# Altium PCB PCB.PcbDoc
Units mm, origin at the board's own origin, x right, y up, seen from the top; angles counter-clockwise.
Board outline 95.25 x 75.25 mm, 2 copper layers (Top Layer, Bottom Layer); 50 components, 55 nets, 168 pads, 12 vias.
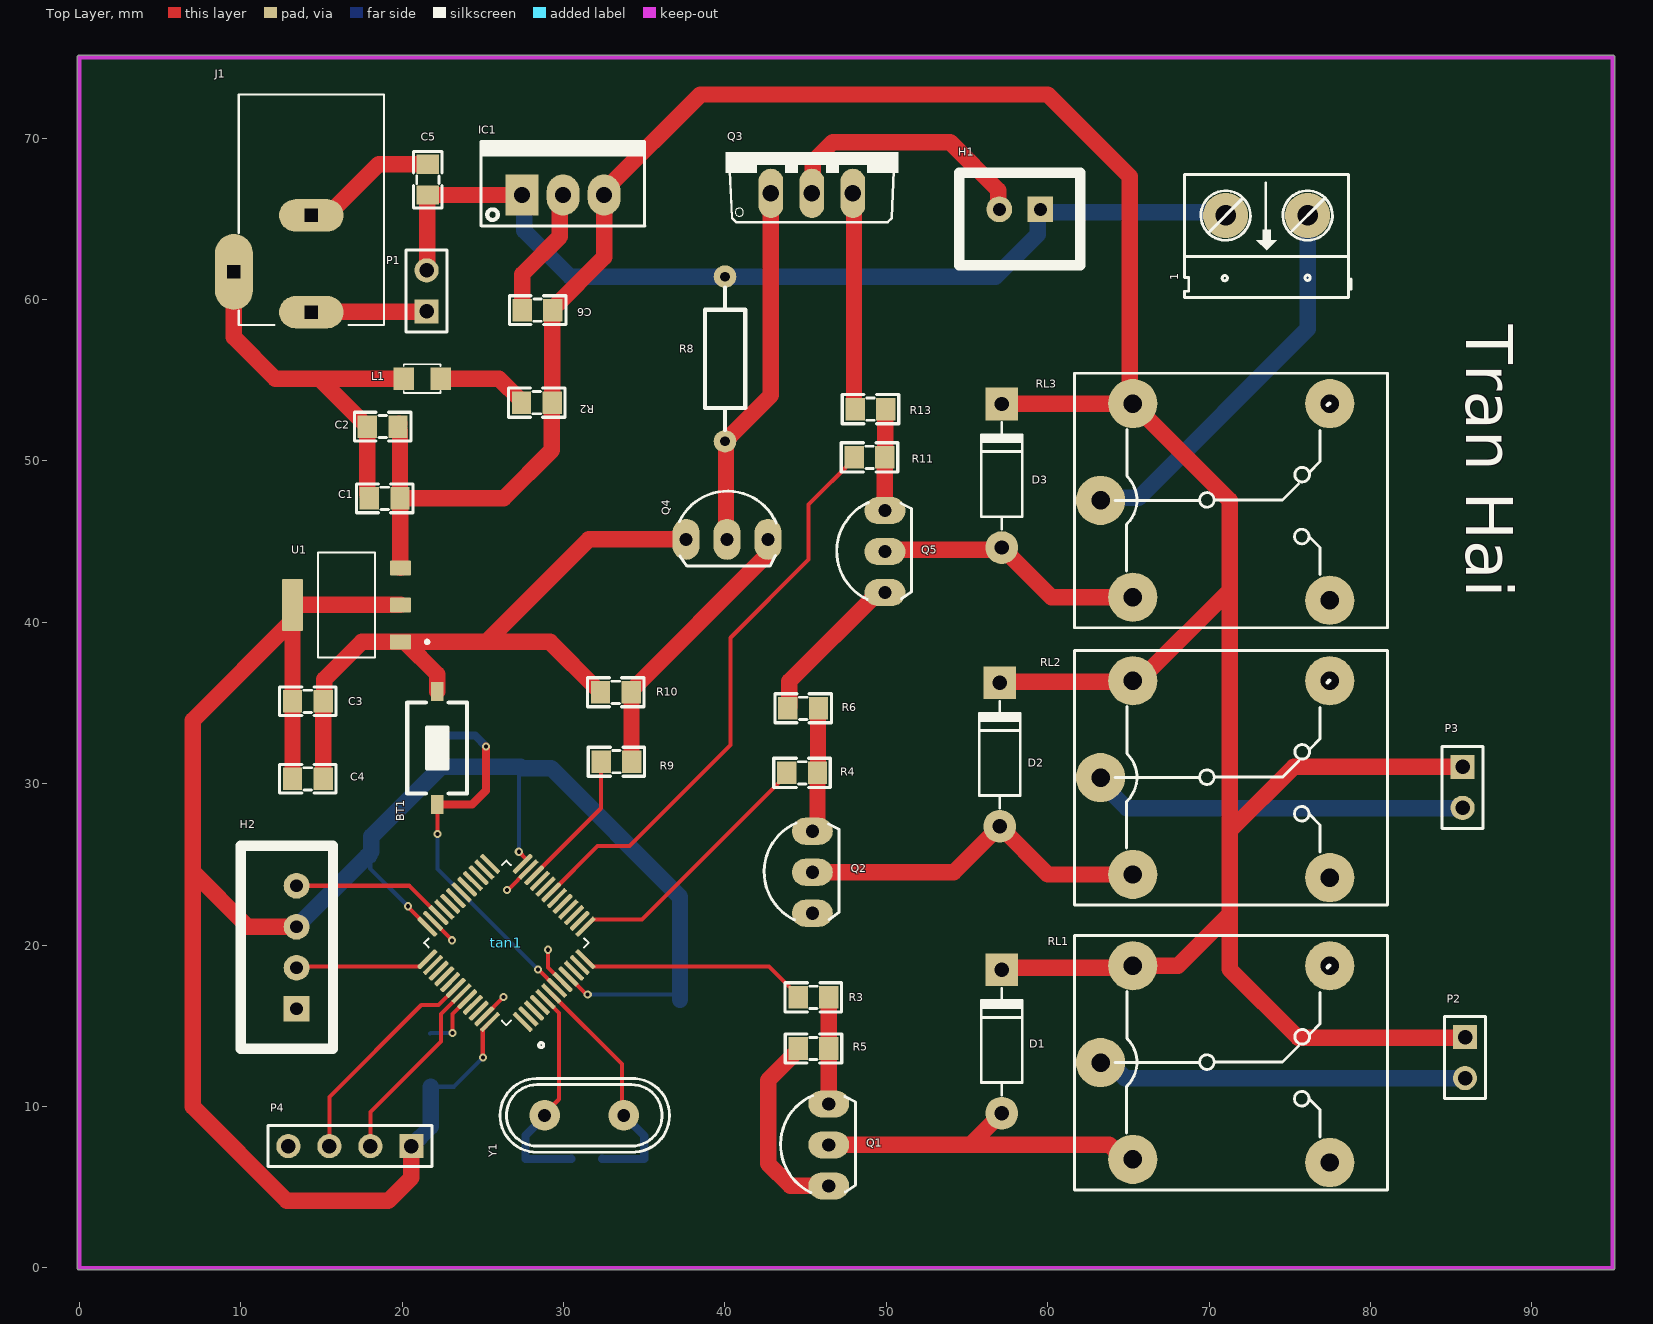
[diagram p0: Top Layer view]
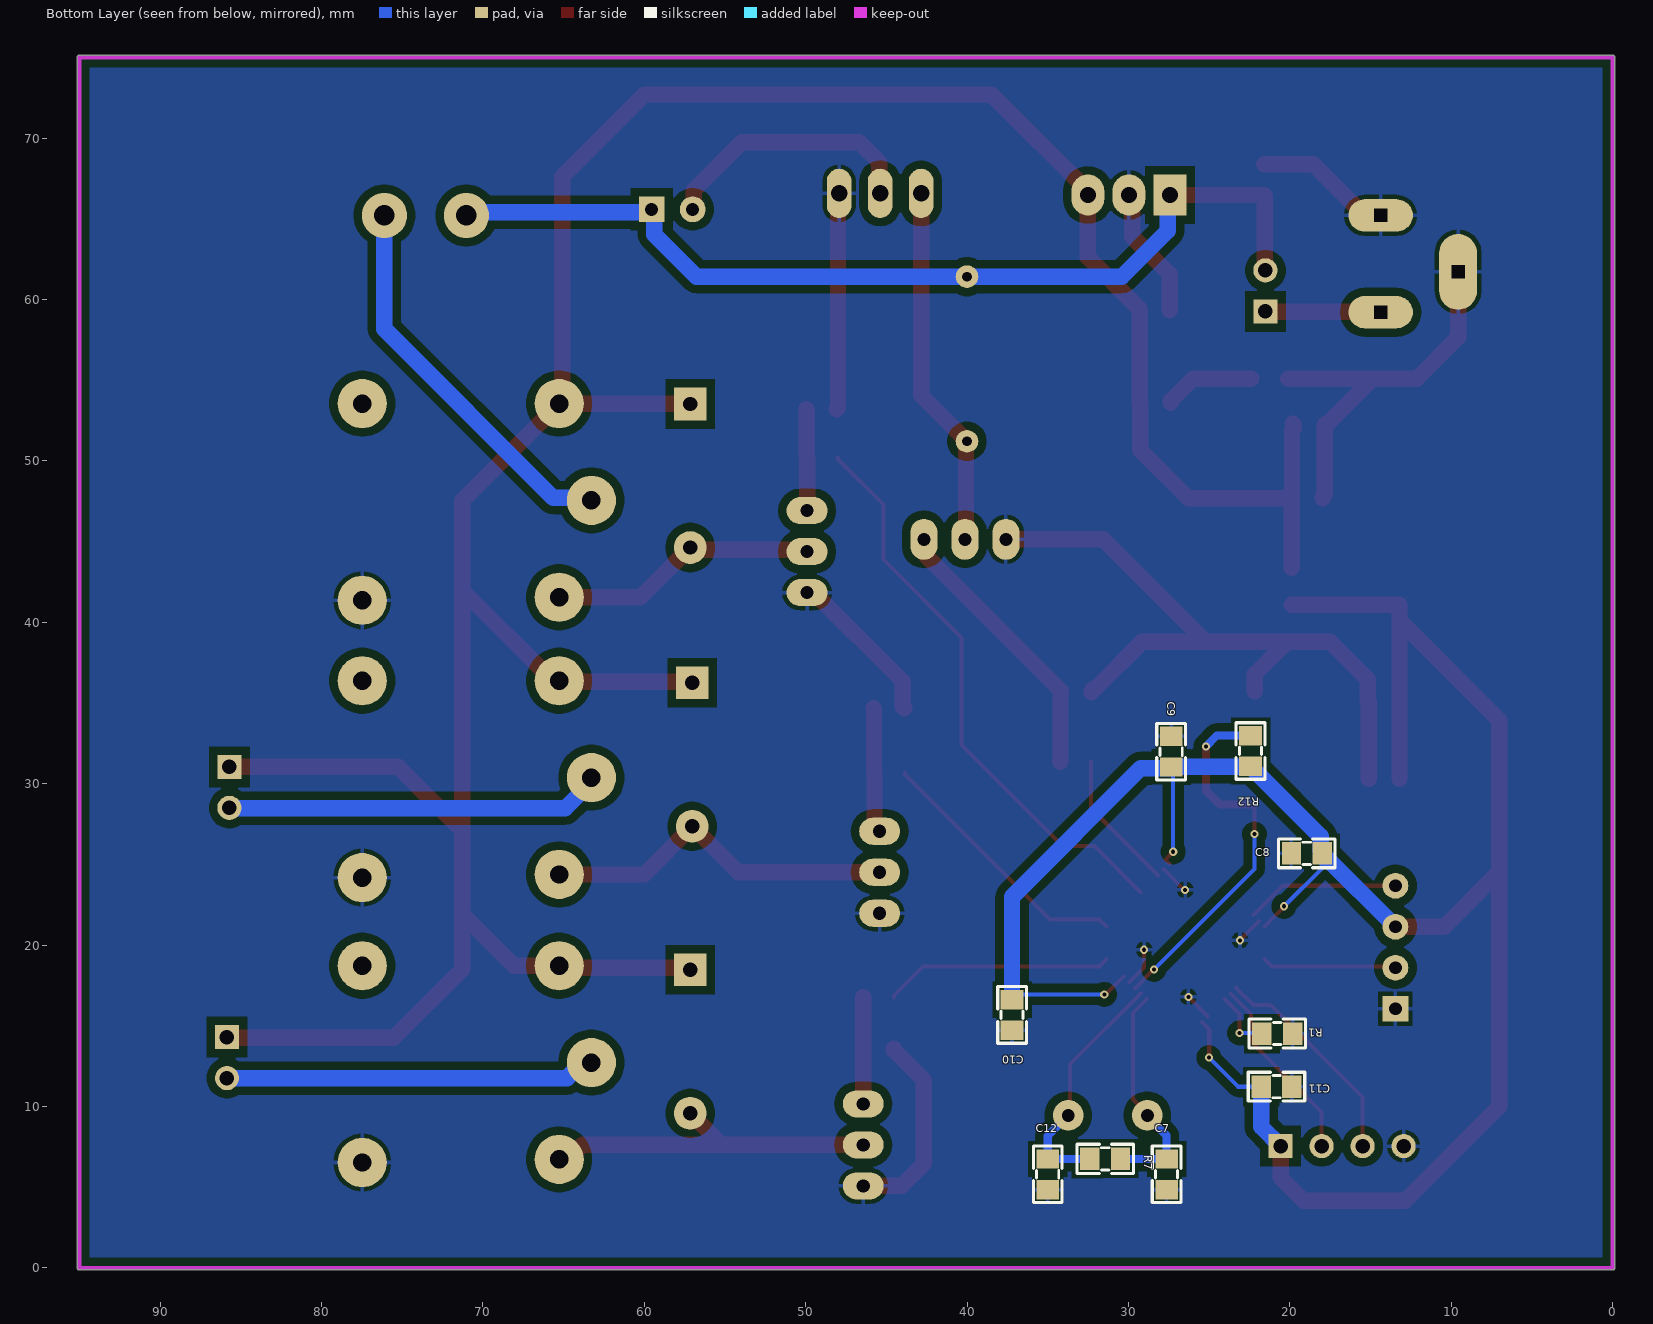
[diagram p1: Bottom Layer view, seen from below]
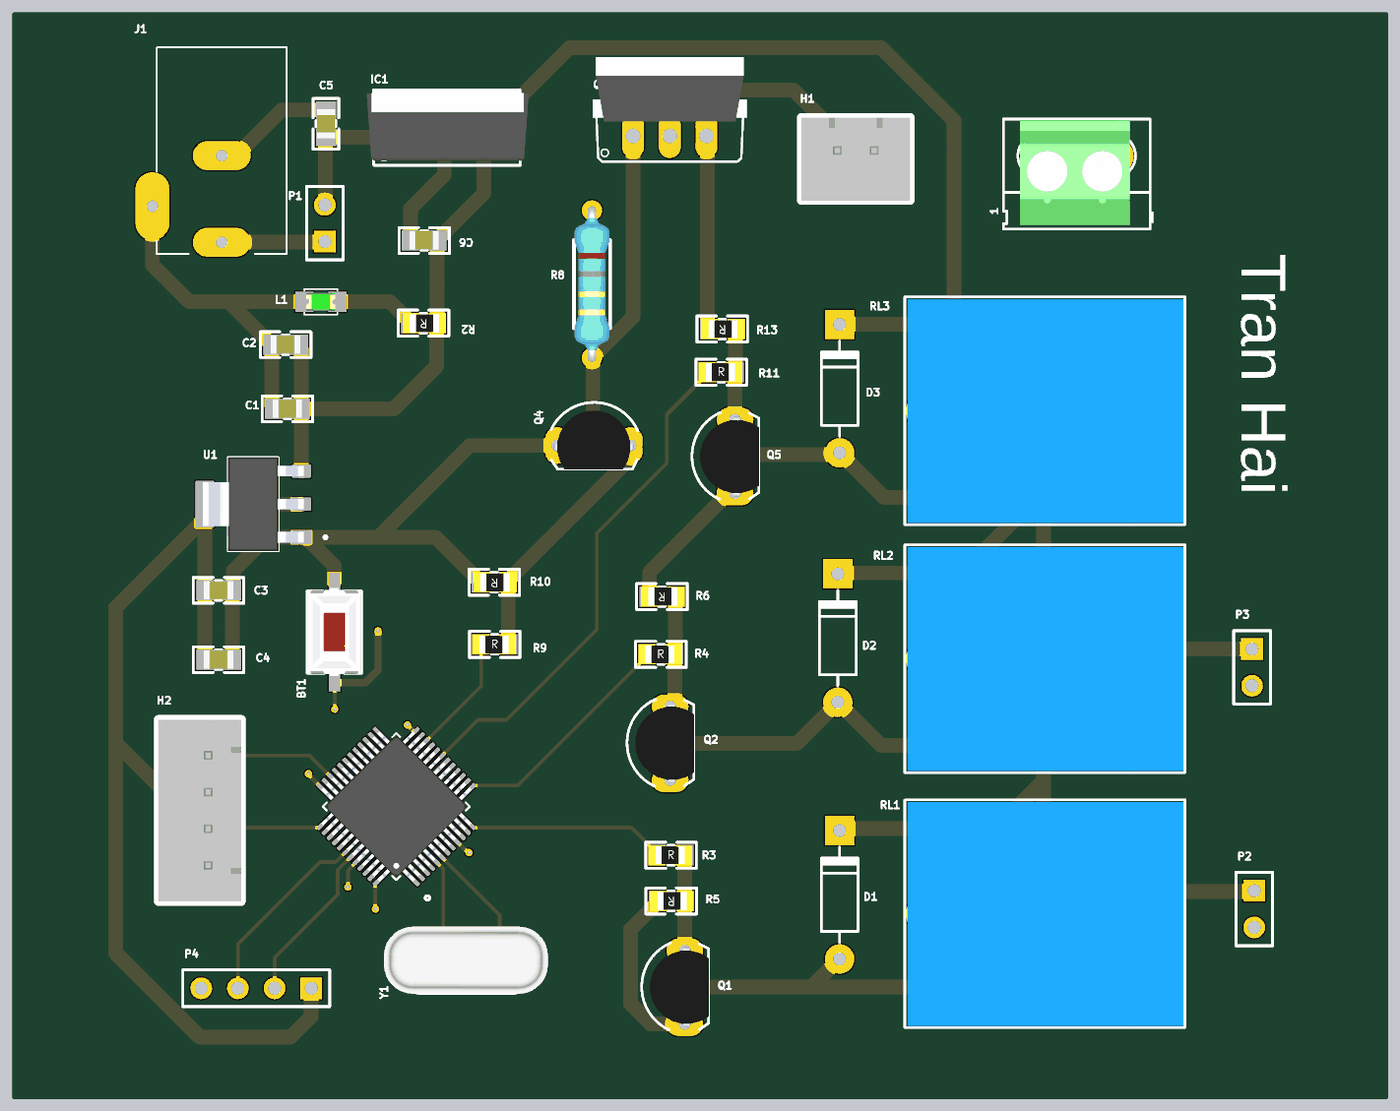
[diagram p2: 3D render of the assembled board from above, using the file's embedded part models]
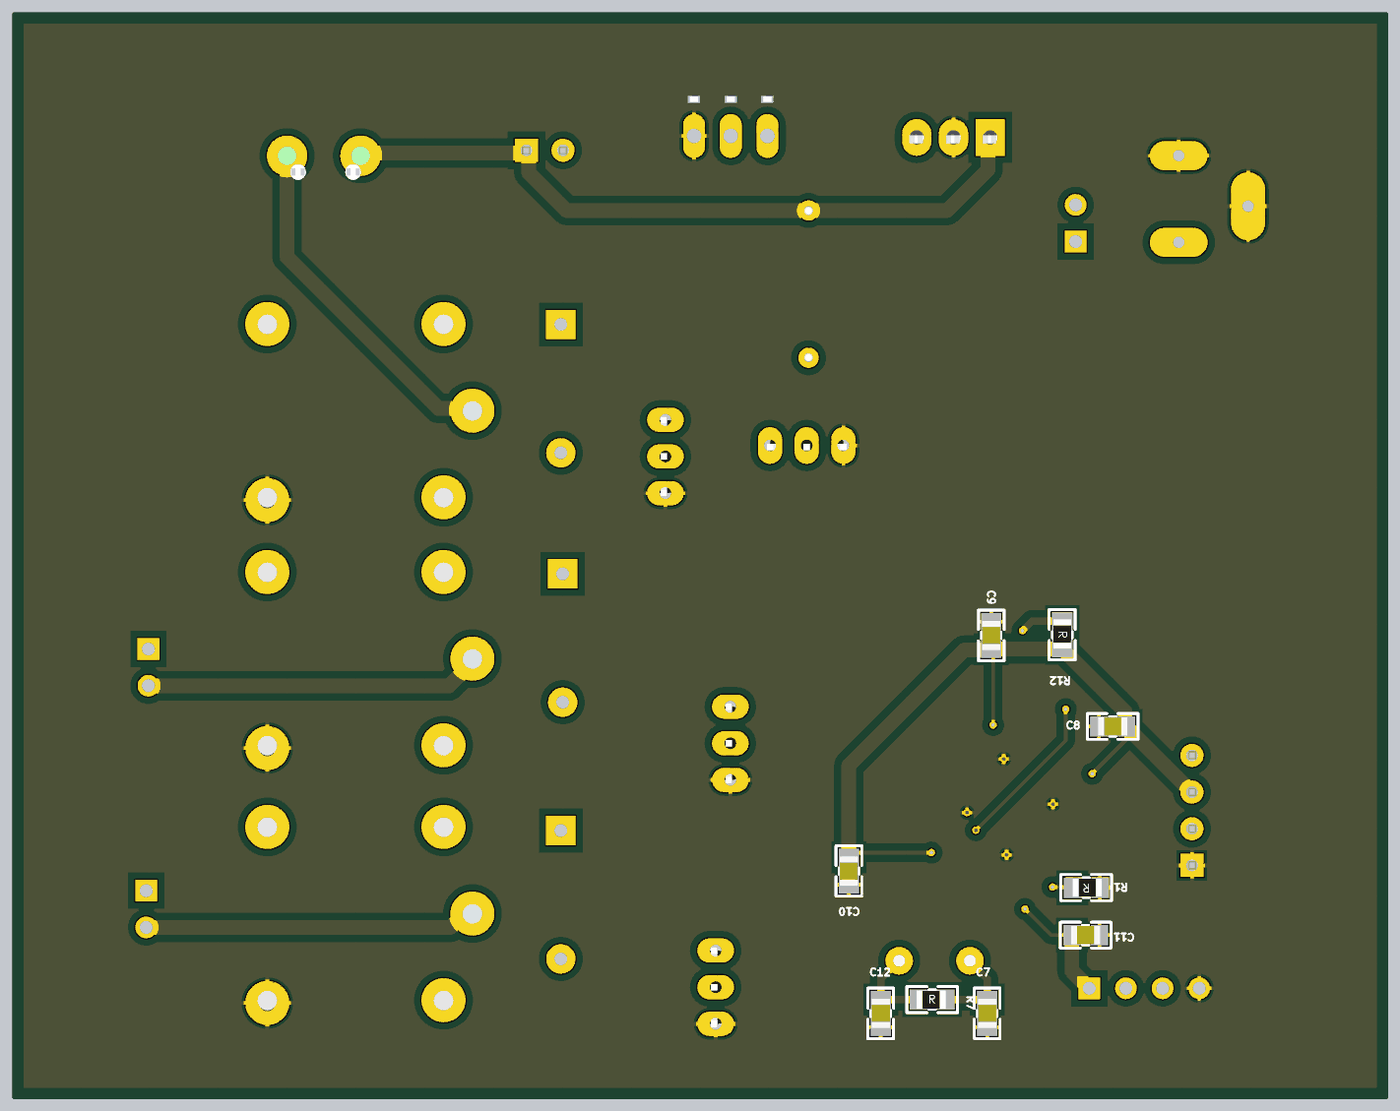
[diagram p3: 3D render of the assembled board from below, using the file's embedded part models]

## Layer stack, top to bottom
Top Solder: solder mask 0.0102, Solder Resist, Dk 3.5
Top Layer: signal copper 0.0356
Dielectric 1: dielectric 0.32, FR-4, Dk 4.8
Bottom Layer: signal copper 0.0356
Bottom Solder: solder mask 0.0102, Solder Resist, Dk 3.5

## Board outline
-0.127,0 ccw(c0,0) 0,-0.127 95,-0.127 ccw(c95,0) 95.127,0 95.127,75 ccw(c95,75) 95,75.127 0,75.127 ccw(c0,75) -0.127,75

## Design rules (kind name [scope] priority, off if disabled: settings)
Clearance [All] p1: gap=0.508 ignorepadtopadclearanceinfootprint=FALSE except(0: Arc-Text Track-Text SMDPad-Text THPad-Text Via-Text Fill-Text Poly-Text Region-Text Text-Text; 0.127: Arc-Arc Arc-Track Arc-SMDPad Arc-THPad Arc-Via Track-Track Track-SMDPad Track-THPad Track-Via SMDPad-SMDPad SMDPad-THPad SMDPad-Via SMDPad-Hole THPad-THPad THPad-Hole; 0.254: Arc-Hole Track-Hole THPad-Via Via-Via Via-Hole Fill-Hole Poly-Hole Region-Hole Text-Hole)
PolygonConnect [All] p1: connectstyle=Relief reliefconductorwidth=0.254 reliefentries=4 polygonreliefangle="90 Angle" airgapwidth=0.254
RoutingVias [All] p1: holewidth=0.381 width=0.762 viastyle="Through Hole" minholewidth=0.254 minwidth=0.508 maxholewidth=0.711 maxwidth=1.27
SolderMaskExpansion [All] p1: expansion=0.102 istentingtop=FALSE
Width [All] p1: maxlimit=1.016 minlimit=0.254 preferedwidth=0.508 minimp=50.000000 maximp=50.000000 favimp=50.000000
30 further rules are at their usual default settings.

## Components (designator, comment, footprint, x,y, rotation, side; value= is the part's Value field where it differs from the comment)
1 "CON 2 KF301" "Con 2 KF301 5.08" 76.098,65.202 r180 top
BT1 "Nut Nhan 2 Chan SMD 3x6x2.5" "Nut Nhan 2 Chan SMD 3x6x2.5" 22.174,32.207 r270 top
C1 "10uF" "Tu 0805" 18.923,47.676 r180 top
C2 "100nF" "Tu 0805" 18.796,52.121 r180 top
C3 "100nF" "Tu 0805" 14.154,35.106 r0 top
C4 "10uF" "Tu 0805" 14.154,30.306 r0 top
C5 "10uF" "Tu 0805" 21.587,67.417 r90 top
C6 "10uF" "Tu 0805" 28.397,59.334 r180 top
C7 "20pF" "tu 0805" 27.636,5.803 r270 bottom
C8 "100nF" "tu 0805" 18.948,25.679 r0 bottom
C9 "100nF" "tu 0805" 27.356,31.979 r90 bottom
C10 "100nF" "tu 0805" 37.211,15.672 r270 bottom
C11 "4.7uF" "tu 0805" 20.828,11.227 r180 bottom
C12 "20pF" "tu 0805" 35.002,5.803 r270 bottom
D1 "1N4007" D1A 57.15,9.576 r270 top
D2 "1N4007" D1A 57.023,27.356 r270 top
D3 "1N4007" D1A 57.15,44.628 r270 top
H1 "Đèn" XH2.54M-2 59.538,65.583 r180 top
H2 "Header 4P 2.54 Duc Thang" XH2.54M-4 13.462,16.053 r90 top
IC1 "LM7805" QTO-220 27.432,66.472 r0 top
J1 "DC-005" NINIGI_DC-005 14.376,61.707 r270 top
L1 "LED 0805" LED-0805-Green 22.377,55.093 r180 top
P1 "Header 2" HDR1X2 21.514,59.258 r90 top
P2 "Header 2" HDR1X2 85.852,14.3 r270 top
P3 "Header 2" HDR1X2 85.7,31.039 r270 top
P4 "Header 4" HDR1X4 20.574,7.544 r180 top
Q1 "C1815" TO92 46.431,7.62 r90 top value=C9014
Q2 "C1815" TO92 45.415,24.511 r90 top value=C9014
Q3 "IRF520" TO220BV 45.39,69.113 r0 top
Q4 "C1815" TO92 40.132,45.136 r0 top value=C9014
Q5 "C1815" TO92 49.911,44.374 r90 top value=C9014
R1 "10k" "tro smd 0805" 20.777,14.453 r0 bottom
R2 "1k" "tro smd 0805" 28.346,53.543 r180 top
R3 "1k" "tro smd 0805" 45.477,16.825 r0 top
R4 "1k" "tro smd 0805" 44.78,30.734 r0 top
R5 "1k" "tro smd 0805" 45.486,13.528 r180 top
R6 "1k" "tro smd 0805" 44.851,34.61 r180 top
R7 "1M" "tro smd 0805" 31.446,6.819 r180 bottom
R8 "10k" "tro vach 1/4w" 40.005,56.312 r90 top
R9 "1k" "tro smd 0805" 33.274,31.42 r0 top
R10 "1k" "tro smd 0805" 33.243,35.601 r180 top
R11 "1k" "tro smd 0805" 48.957,50.277 r0 top
R12 "10k" "tro smd 0805" 22.377,32.029 r270 bottom
R13 "1k" "tro smd 0805" 49.022,53.137 r180 top
RL1 "Phun sương" "Relay 5 Chan SRD" 63.27,12.72 r0 top
RL2 "Quạt" "Relay 5 Chan SRD" 63.27,30.373 r0 top
RL3 "Bơm nước" "Relay 5 Chan SRD" 63.27,47.549 r0 top
tan1 "STM32F103C8T6" QFP50P900X900X160-48N 26.459,20.132 r135 top
U1 "AMS1117-3.3" SOT229P700X180-4N 16.553,41.072 r180 top
Y1 "8Mhz" "Thach Anh 2 chan cam" 31.279,9.449 r180 top value=4Mhz

## Footprints (in the part's own frame and the unit in brackets; to place one, negate y for a bottom-side part, rotate by r counter-clockwise, add the part's x,y. Pads: shape width x height; smd on the part's side, far side on the other; paste and mask are expansions set on the pad)
"Con 2 KF301 5.08" [mil]
  round 110 hole 50: 1(0,0) 2(200,0)
  silkscreen extent -106,-100 300,200, body extent -45,-97 255,190, height 335
D1A [mil] "Diode 1A, W 100mil, L 350mil"
  round 80 hole 35: 1(0,0)
  rect 80x80 hole 35: 2(-350,0)
  silkscreen extent -305,-50 -45,50, body extent -366,-42 16,41, height 100
HDR1X2 [mm] "Connector; Header; 2 Position"
  rect 1.5x1.5 hole 0.9: 1(0,0)
  round 1.5 hole 0.9: 2(2.54,0)
  silkscreen extent -1.27,-1.27 3.81,1.27, body extent -1.27,-1.27 3.81,1.27, height 7
HDR1X4 [mm] "Connector; Header; 4 Position"
  rect 1.5x1.5 hole 0.9: 1(0,0)
  round 1.5 hole 0.9: 2(2.54,0) 3(5.08,0) 4(7.62,0)
  silkscreen extent -1.27,-1.27 8.89,1.27, body extent -1.27,-1.27 8.89,1.27, height 7
LED-0805-Green [mil]
  rect 50x55 smd: 1(0,0) 2(90,0)
  silkscreen extent 0,-35 90,35, body extent 5,-25 85,25, height 43
NINIGI_DC-005 [mm]
  oval 4.7x2.35 hole 0.8 square: 2(0,-4.8)
  oval 2x4 hole 0.8 square: 3(-3.5,0) 4(2.5,0)
  silkscreen extent -11,-4.5 3.3,4.5
"Nut Nhan 2 Chan SMD 3x6x2.5" [mm] "Switch SMD type"
  rect 1.2x0.8 smd: 1(-3.5,0) 2(3.5,0)
  silkscreen extent -2.82,-1.85 2.82,1.85, body extent -3.05,-1.85 3.05,1.85, height 2.5
QFP50P900X900X160-48N [mm]
  rrect50% 1.56x0.28 smd: 1(-4.18,2.75) 2(-4.18,2.25) 3(-4.18,1.75) 4(-4.18,1.25) 5(-4.18,0.75) 6(-4.18,0.25) 7(-4.18,-0.25) 8(-4.18,-0.75) 9(-4.18,-1.25) 10(-4.18,-1.75) 11(-4.18,-2.25) 12(-4.18,-2.75) 25(4.18,-2.75) 26(4.18,-2.25) 27(4.18,-1.75) 28(4.18,-1.25) 29(4.18,-0.75) 30(4.18,-0.25) 31(4.18,0.25) 32(4.18,0.75) 33(4.18,1.25) 34(4.18,1.75) 35(4.18,2.25) 36(4.18,2.75)
  rrect50% 0.28x1.56 smd: 13(-2.75,-4.18) 14(-2.25,-4.18) 15(-1.75,-4.18) 16(-1.25,-4.18) 17(-0.75,-4.18) 18(-0.25,-4.18) 19(0.25,-4.18) 20(0.75,-4.18) 21(1.25,-4.18) 22(1.75,-4.18) 23(2.25,-4.18) 24(2.75,-4.18) 37(2.75,4.18) 38(2.25,4.18) 39(1.75,4.18) 40(1.25,4.18) 41(0.75,4.18) 42(0.25,4.18) 43(-0.25,4.18) 44(-0.75,4.18) 45(-1.25,4.18) 46(-1.75,4.18) 47(-2.25,4.18) 48(-2.75,4.18)
  silkscreen extent -6.15,-3.6 3.6,3.6, body extent -4.5,-4.5 4.5,4.5, height 1.6
QTO-220 [mil] "TO-220 - 1-2-3"
  rect 80x100 hole 39: 1(0,0)
  oval 80x100 hole 39: 2(100,0) 3(200,0)
  silkscreen extent -100,-76 300,130, body extent -119,-64 322,121, height 905
"Relay 5 Chan SRD" [mil] "Relay SPDT, 5 pin, 10A,W 650mil, L 800mil, H 800mil"
  round 120 hole 45: 1(0,0) 2(559.06,236.22) 3(559.06,-243.78) 4(78.74,-236.22) 5(78.74,236.22)
  silkscreen extent -63,-311 700,310, body extent -55,-306 697,304, height 602
SOT229P700X180-4N [mm]
  rrect15% 1.31x0.93 smd: 1(-3.345,2.29) 2(-3.345,0) 3(-3.345,-2.29)
  rrect15% 1.31x3.24 smd: 4(3.345,0)
  silkscreen extent -5.1,-3.25 1.75,3.25, body extent -3.5,-3.25 3.5,3.25, height 1.8
"Thach Anh 2 chan cam" [mm]
  round 1.905 hole 0.8: 1(-2.45,0) 2(2.45,0)
  silkscreen extent -5.28,-2.29 5.21,2.29, body extent -5.68,-2.36 5.68,2.29, height 3.5
TO92 [mil] "TO-92"
  oval 66x100 hole 32: 1(-100,0) 2(0,0) 3(100,0)
  silkscreen extent -117,-65 120,118, body extent -109,-66 109,95, height 245
TO220BV [mil]
  oval 60x120 hole 40: D(0,-100) G(-100,-100) S(100,-100)
  silkscreen extent -210,-170 210,0, body extent -202,-60 202,114, height 783
"tro smd 0805" [mm]
  rect 1.2x1.4 smd: 1(-0.946,-0.061) 2(0.954,-0.061)
  silkscreen extent -1.75,-0.97 1.75,0.84, body extent -1.56,-0.76 1.44,0.64, height 0.53
"tro vach 1/4w" [mm]
  round 1.4 hole 0.6: 1(-5.1,0) 2(5.1,0)
  silkscreen extent -4.39,-1.25 4.42,1.25, body extent -5.38,-1.2 5.38,1.2, height 2.41
"Tu 0805" [mm] "Compoment SMD 80x50mil"
  rect 1.2x1.4 smd: 1(-0.946,-0.003) 2(0.954,-0.003)
  silkscreen extent -1.75,-0.89 1.75,0.89, body extent -1.01,-0.64 1.01,0.63, height 0.61
"tu 0805" [mm] "Compoment SMD 80x50mil"
  rect 1.2x1.4 smd: 1(-0.946,-0.003) 2(0.954,-0.003)
  silkscreen extent -1.75,-0.89 1.75,0.89, body extent -1.01,-0.64 1.01,0.63, height 0.61
XH2.54M-2 [mm]
  rect 1.6x1.6 hole 0.8: 1(0,0)
  round 1.6 hole 0.8: 2(2.54,0)
  silkscreen extent -2.48,-2.26 5.02,3.46, body extent -2.48,-2.26 5.02,3.48, height 6.91
XH2.54M-4 [mm]
  rect 1.6x1.6 hole 0.8: 1(0,0)
  round 1.6 hole 0.8: 2(2.54,0) 3(5.08,0) 4(7.62,0)
  silkscreen extent -2.48,-2.26 10.1,3.46, body extent -2.48,-2.26 10.1,3.48, height 6.91

## Part data
1 H2: "Cắm", Chung_Loai=Cắm, Don_Vi=Con
  1: Ma_Hang=MH000987, Ten_Linh_Kien="CON 2 KF301-2P 5.08MM Xanh Dương"
  H2: Ma_Hang=MH001285, Ten_Linh_Kien="Header 4P XH2.54-4P Đực Thẳng"
C1 C2 C3 C4 C5 C6: library part "Tu 0805 200pF 50V 10%", "Dán", Chung_Loai=Dán, Don_Vi=Con, Ma_Hang=MH008100, So_Chan=2, Ten_Linh_Kien="Tụ 0805 200p 10% 50V"
C7 C8 C9 C10 C11 C12: library part "Tu 0805 101 50V 20%", "Dán", Chung_Loai=Dán, Don_Vi=Con, Ma_Hang=MH002806, So_Chan=2, Ten_Linh_Kien="Tụ 0805 101-0.1nF 50V 20%"
D1 D2 D3: library part D1A, "Diode 1A"
H1: library part "Header 2P 2.54 Duc Thang", "Cắm", Chung_Loai=Cắm, Don_Vi=Con, Ma_Hang=MH001283, Ten_Linh_Kien="Header 2P XH2.54-2P Đực Thẳng"
IC1: library part LM78xx, "On ap +, from + 5 to + 24VDC"
J1: "DC Jack", Package=None, Availability=Unavailable, MP=DC-005, Price=None
L1: library part "LED 0805 Xanh La", "Dán", Chung_Loai=Dán, Don_Vi=Con, Ma_Hang=MH002326, Ten_Linh_Kien="LED 0805 Màu Xanh Lá (Green)"
P1 P2 P3: "Header, 2-Pin", LatestRevisionDate=17-Jul-2002
  P2 P3: LatestRevisionNote="Re-released for DXP Platform.", Publisher="Altium Limited"
P4: "Header, 4-Pin", LatestRevisionDate=17-Jul-2002, LatestRevisionNote="Re-released for DXP Platform.", Publisher="Altium Limited"
Q1 Q2 Q4 Q5: "NPN transistor"
Q3: "N-Channel 100 V 9.2A (Tc) 3.7W (Ta), 60W (Tc) Surface Mount D2PAK", Package="TO-220-3 Vishay", Availability="In Stock", Check_prices=https://www.snapeda.com/parts/IRF520/Vishay+Siliconix/view-part/?ref=eda, MF="Vishay Siliconix", MP=IRF520, Price=None, Purchase-URL=https://pricing.snapeda.com/search/part/IRF520/?ref=eda, SnapEDA_Link=https://www.snapeda.com/parts/IRF520/Vishay+Siliconix/view-part/?ref=snap
R1 R2 R7 R12: library part "Tro 0805 1% 10k", "Dán", Chung_Loai=Dán, Don_Vi=Con, Ma_Hang=MH005473, So_Chan=2, Ten_Linh_Kien="Trở 0805 1% 10k"
R3 R4 R5 R6 R9 R10 R11 R13: library part "Tro 0805 1% 1k", "Dán", Chung_Loai=Dán, Don_Vi=Con, Ma_Hang=MH005468, So_Chan=2, Ten_Linh_Kien="Trở 0805 1% 1k"
R8: library part "Tro Vach 1/4W 5% 10k", "Căm", Chung_Loai=Cắm, Don_Vi=Con, Ma_Hang=MH007354, So_Chan=2, Ten_Linh_Kien="Trở Vạch 1/4w 5% 10K"
RL1 RL2 RL3: library part "Relay 5 Chan SRD", "Relay 5 Chan", Ma_Hang=MH009374, Ten="Relay 5V10A SRD-05VDC-SL-C Chính Hãng"
tan1: "ARM® Cortex®-M3 STM32F1 Microcontroller IC 32-Bit 72MHz 64KB (64K x 8) FLASH 48-LQFP (7x7)", Package="LQFP-48 STMicroelectronics", MF=STMicroelectronics
U1: "Sot223/Pkg 1-Amp 3.3-Volt Low Drop Out Voltage Regulatator", Package="SOT-223 Seeed Technology", Availability="Not in stock", Check_prices=https://www.snapeda.com/parts/AMS1117-3.3/Advanced+Monolithic+Systems/view-part/?ref=eda, MF="Advanced Monolithic Systems", MP=AMS1117-3.3, Price=None, SnapEDA_Link=https://www.snapeda.com/parts/AMS1117-3.3/Advanced+Monolithic+Systems/view-part/?ref=snap
Y1: library part "Thach Anh 2 chan Cam", "Crystal For all Crystal 2pin."
BT1: Ma_Hang=MH001036, Ten="Nút Nhấn 2 Chân 3x6x2.5MM SMD"

## Via types
v1: diameter 0.508, hole 0.254, Top Layer to Bottom Layer, 12 vias

## Nets (pads, with @x,y where several pads share a name; then routed paths per layer and width w, separated by ;. In a path a pad name is that pad's centre, name@x,y a point inside that pad or via, vN(x,y) a via of type N, cw(c..) or ccw(c..) an arc to the next point about the centre after c; other vN are vias at no path point)
3.3V: C3.1 C4.1 C8.1 C9.1 C10.1 C11.1 H2.3 P4.1 R12.2 tan1.9 tan1.24 tan1.36 tan1.48 U1.2 U1.4 | length 145.2
  Top Layer w0.254: v1(20.371,22.403) 20.371,22.349 21.558,21.161 tan1.36 ; v1(25.019,13.03) 24.995,13.054 24.995,14.779 tan1.48 ; v1(27.229,25.781) 27.714,25.295 27.714,25.277 tan1.24 ; tan1.9 30.316,18.06 31.435,16.942 v1(31.496,16.942)
  Top Layer w1.016: C4.1 C3.1 U1.4@13.208,40.107 ; H2.3 10.439,21.133 7.036,24.536 ; U1.2 U1.4 U1.4@13.208,40.107 ; P4.1 20.574,5.588 19.152,4.166 12.852,4.166 7.036,9.982 7.036,24.536 ; 7.036,24.536 7.036,33.935 U1.4@13.208,40.107
  Bottom Layer w0.254: C8.1 18.023,25.663 18.023,24.751 v1(20.371,22.403) ; C11.1 23.212,11.223 v1(25.019,13.03) ; v1(27.229,25.781) 27.229,30.909 C9.1 ; v1(31.496,16.942) 36.89,16.942 C10.1
  Bottom Layer w1.016: H2.3 17.82,25.491 17.911,25.491 18.003,25.583 C8.1@18.003,25.674 ; C8.1 18.095,25.775 18.095,26.732 22.246,30.883 22.246,30.983 22.338,31.075 R12.2 22.459,31.054 27.331,31.054 C9.1 27.423,30.963 29.235,30.963 37.214,22.984 C10.1 ; P4.1 21.774,8.743 C11.1
5V: C1.1 C2.1 C6.1 D1.2 D2.2 D3.2 IC1.3 P2.1 P3.1 R2.1 RL1.5 RL2.5 RL3.5 U1.3 | length 198.5
  Top Layer w1.016: C2.1@19.742,52.024 19.869,51.897 C1.1 ; C2.1 19.742,52.224 C2.1@19.834,52.316 ; U1.3 19.883,43.376 19.883,47.665 C1.1 ; C6.1 29.292,59.287 R2.1 29.261,53.573 29.261,50.648 26.292,47.679 C1.1 ; C6.1@29.343,59.438 32.512,62.607 IC1.3 32.512,66.726 38.481,72.695 59.995,72.695 65.075,67.615 65.075,53.744 RL3.5 ; D2.2 57.087,36.309 65.206,36.309 RL2.5 65.659,36.373 71.272,41.986 ; D1.2 57.277,18.593 65.143,18.593 RL1.5 68.072,18.72 71.272,21.92 ; D3.2 57.165,53.533 65.254,53.533 RL3.5 ; P3.1 75.235,31.039 71.272,27.076 ; P2.1 85.801,14.249 75.514,14.249 71.272,18.491 71.272,21.92 ; RL3.5 71.272,47.546 71.272,41.986 ; 71.272,21.92 71.272,27.076 ; 71.272,27.076 71.272,41.986
12V: J1.4 P1.1 | length 7.2
  Top Layer w1.016: J1.4 14.402,59.233 21.488,59.233 P1.1
12V_s: 1.2 C5.1 H1.1 IC1.1 P1.2 R8.2 | length 60.2
  Top Layer w1.016: P1.2 21.552,61.836 21.552,66.434 C5.1 IC1.1
  Bottom Layer w1.016: IC1.1 27.573,66.33 27.573,64.248 30.409,61.412 R8.2 56.764,61.412 59.374,64.023 59.374,65.42 H1.1 59.728,65.392 70.828,65.392 1.2
GND: BT1.1 C1.2 C2.2 C3.2 C4.2 C5.2 C6.2 C7.2 C8.2 C9.2 C10.2 C11.2 C12.2 H2.1 IC1.2 J1.2 J1.3 L1.2 P4.4 Q1.1 Q2.1 Q3.S Q4.1 Q5.1 R1.1 R5.2 R6.2 R10.2 R13.2 RL1.3 RL2.3 RL3.3 tan1.8 tan1.23 tan1.35 tan1.47 U1.1 | length 129.2
  Top Layer w0.254: tan1.35 21.912,21.484 23.089,20.307 v1(23.089,20.295) ; tan1.47 25.094,15.59 26.289,16.785 v1(26.289,16.789) ; v1(26.492,23.419) 26.545,23.419 27.805,24.679 tan1.23 ; v1(29.032,19.71) 29.032,18.619 tan1.8
  Top Layer w0.508: Q4.1@37.592,44.704 Q4.1
  Top Layer w1.016: J1.2 9.576,57.657 12.141,55.093 14.873,55.093 ; J1.3 15.376,65.207 18.541,68.372 C5.2 ; C4.2 C3.2 15.174,35.169 15.174,36.46 17.497,38.782 U1.1 U1.1@20.172,38.782 ; C2.2 17.842,47.906 17.969,47.779 C1.2 ; C2.2@17.842,52.224 17.75,52.316 17.65,52.316 14.873,55.093 ; L1.2 14.873,55.093 ; BT1.1@22.158,35.707 BT1.1 22.174,36.779 U1.1@20.172,38.782 ; C6.2 27.443,61.562 29.778,63.897 29.778,66.277 IC1.2 ; R10.2 32.288,35.762 32.196,35.854 32.096,35.854 29.168,38.782 25.218,38.782 ; Q4.1 31.572,45.136 25.218,38.782 ; R6.2 43.988,34.763 43.988,36.343 49.479,41.834 Q5.1 ; R5.2 44.531,13.489 42.672,11.63 42.672,6.452 44.044,5.08 Q1.1 ; Q3.S 47.999,66.504 47.999,53.266 R13.2 ; U1.1@20.172,38.782 25.218,38.782
Net1_1: 1.1 RL3.1 | length 24.3
  Bottom Layer w1.016: RL3.1 63.422,47.701 65.634,47.701 76.098,58.166 1.1
NetD1_1: D1.1 Q1.2 RL1.4 | length 22
  Top Layer w1.016: Q1.2 55.194,7.62 ; D1.1 55.194,7.62 ; RL1.4 64.72,6.72 63.82,7.62 55.194,7.62
NetD2_1: D2.1 Q2.2 RL2.4 | length 22.3
  Top Layer w1.016: Q2.2 54.178,24.511 D2.1 60.006,24.373 RL2.4
NetD3_1: D3.1 Q5.2 RL3.4 | length 16.7
  Top Layer w1.016: Q5.2 50.037,44.5 57.022,44.5 D3.1 60.229,41.549 RL3.4
NetH1_2: H1.2 Q3.D | length 16.4
  Top Layer w1.016: Q3.D 45.431,66.615 45.431,68.495 46.685,69.748 53.95,69.748 56.929,66.769 56.929,65.651 H1.2
NetL1_1: L1.1 R2.2 | length 5.8
  Top Layer w1.016: L1.1@22.395,55.075 L1.1 26.003,55.093 27.374,53.722 27.374,53.586 R2.2
NetP2_2: P2.2 RL1.1 | length 23
  Bottom Layer w1.016: RL1.1 63.82,12.72 64.779,11.76 P2.2
NetP3_2: P3.2 RL2.1 | length 23.4
  Bottom Layer w1.016: RL2.1 63.27,30.1 64.897,28.473 85.674,28.473 P3.2
NetQ1_3: Q1.3 R3.2 R5.1 | length 6.6
  Top Layer w1.016: Q1.3 R5.1 R3.2
NetQ2_3: Q2.3 R4.2 R6.1 | length 7.8
  Top Layer w1.016: Q2.3 45.43,27.051 45.735,27.356 R4.2 45.765,30.704 45.765,34.64 R6.1
NetQ3_G: Q3.G Q4.2 R8.1 | length 22.7
  Top Layer w1.016: Q4.2 40.069,45.199 40.069,51.148 R8.1 42.85,54.057 Q3.G
NetQ4_3: Q4.3 R9.2 R10.1 | length 17.4
  Top Layer w1.016: R10.1 R10.1@34.188,35.762 ; R9.2 34.208,31.379 34.208,35.742 R10.1@34.188,35.762 ; Q4.3 42.546,45.009 42.546,44.119 R10.1@34.188,35.762
NetQ5_3: Q5.3 R11.2 R13.1 | length 6.3
  Top Layer w1.016: Q5.3 R11.2 49.939,50.244 49.939,53.169 R13.1
NetR1_2: R1.2 tan1.44 | length 3.9
  Top Layer w0.254: v1(23.114,14.554) 23.114,15.727 tan1.44
  Bottom Layer w0.254: R1.2 21.772,14.554 v1(23.114,14.554)
OSC_IN: C7.1 R7.2 tan1.5 Y1.2 | length 14
  Top Layer w0.254: Y1.2 28.829,9.557 29.718,10.446 29.718,15.799 28.884,16.633 tan1.5
  Bottom Layer w0.508: Y1.2 28.829,9.403 27.639,8.214 C7.1 27.644,6.753 30.487,6.753 R7.2
OSC_OUT: C12.1 R7.1 tan1.6 Y1.1 | length 15.3
  Top Layer w0.254: tan1.6 33.613,12.624 33.613,9.564 Y1.1
  Bottom Layer w0.508: R7.1 32.396,6.753 35.001,6.753 C12.1 35.005,8.172 Y1.1
PA0: tan1.10
PA1: tan1.11
PA2: R3.1 tan1.12 | length 14.2
  Top Layer w0.254: tan1.12 tan1.12@31.762,18.718 ; tan1.12@31.78,18.718 tan1.12@31.762,18.718 ; R3.1 44.531,16.864 42.727,18.668 31.811,18.668 tan1.12@31.762,18.718
PA3: R4.1 tan1.13 | length 16.5
  Top Layer w0.254: tan1.13 31.811,21.596 34.857,21.596 43.835,30.573 R4.1
PA4: tan1.14
PA5: tan1.15
PA6: tan1.16
PA7: tan1.17
PA8: tan1.29
PA9: tan1.30
PA10: tan1.31
PA11: tan1.32
PA12: tan1.33
PA15: tan1.38
PB0: tan1.18
PB1: R11.1 tan1.19 | length 35.9
  Top Layer w0.254: tan1.19 32.11,26.137 34.087,26.137 40.335,32.385 40.335,39.04 45.187,43.891 45.187,47.291 48.011,50.116 R11.1
PB2: tan1.20
PB3: tan1.39
PB4: tan1.40
PB5: tan1.41
PB6: P4.3 tan1.42 | length 13.7
  Top Layer w0.254: P4.3 15.494,10.592 21.184,16.281 22.254,16.281 tan1.42
PB7: P4.2 tan1.43 | length 11.8
  Top Layer w0.254: P4.2 18.034,9.652 22.403,14.021 22.403,15.723 tan1.43
PB8: tan1.45
PB9: tan1.46
PB10: tan1.21
PB11: R9.1 tan1.22 | length 8.8
  Top Layer w0.254: tan1.22 32.328,28.477 R9.1
PB12: tan1.25
PB13: tan1.26
PB14: tan1.27
PB15: tan1.28
RESET: BT1.2 R12.1 tan1.7 | length 23.6
  Top Layer w0.254: BT1.2 22.2,28.682 v1(22.2,26.873) ; v1(28.423,18.491) 28.438,18.491 29.576,17.353 tan1.7
  Top Layer w0.508: BT1.2 24.338,28.707 25.197,29.566 v1(25.197,32.309)
  Bottom Layer w0.254: v1(22.2,26.873) 22.2,24.714 v1(28.423,18.491)
  Bottom Layer w0.508: R12.1 24.531,32.975 v1(25.197,32.309)
SWCLK: H2.2 tan1.37 | length 8.3
  Top Layer w0.254: H2.2 13.537,18.668 21.106,18.668 tan1.37
SWIO: H2.4 tan1.34 | length 9.6
  Top Layer w0.254: H2.4 20.443,23.673 tan1.34
VBAT: tan1.1
pads on no net: RL1.2 RL2.2 RL3.2 tan1.2 tan1.3 tan1.4

## Polygon pours and split planes (outlines as drawn)
GND on Bottom Layer "GND_L02_P000" (solid, pour order 0): -0.152,0.127 -0.305,0.279 -0.305,75.082 94.818,75.082 95.123,74.778 95.123,0

## Keep-outs
Keep-Out Layer:
  lines w0.254: 0,0 0,75 95,75 95,0 0,0

## Silkscreen, mask and mechanical layers (free items; w line width, h text height)
Top Overlay:
  text "Tran Hai" at 84.963,58.445 h5 r270